# Altium PCB RPI_HAT_Flash_00.PcbDoc
Units mm, origin at the board's own origin, x right, y up, seen from the top; angles counter-clockwise.
Board outline 65 x 56 mm, 2 copper layers (Top Layer, Bottom Layer), stack 1.571 mm thick; 53 components, 63 nets, 183 pads, 155 vias.
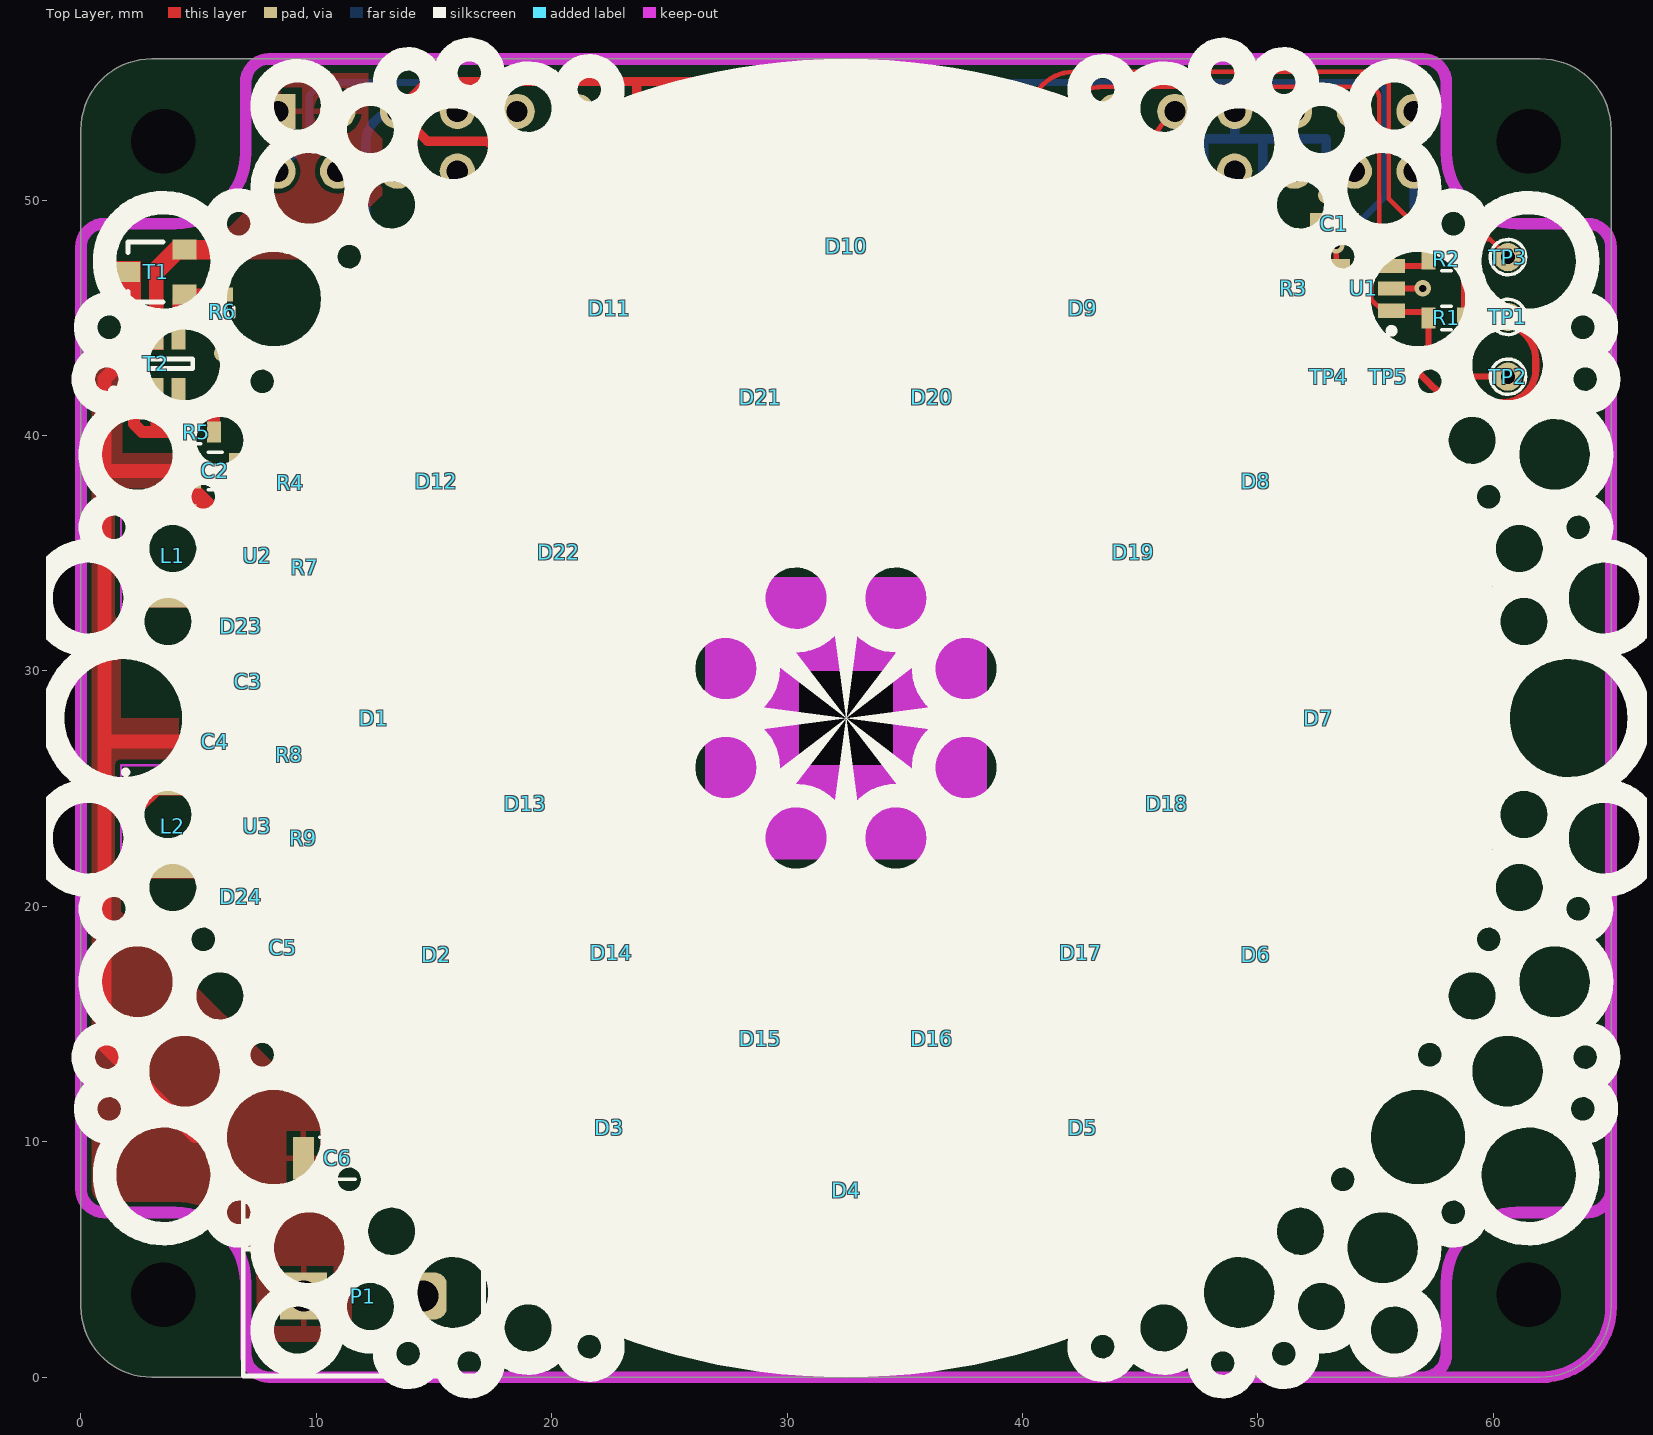
[diagram p0: Top Layer view]
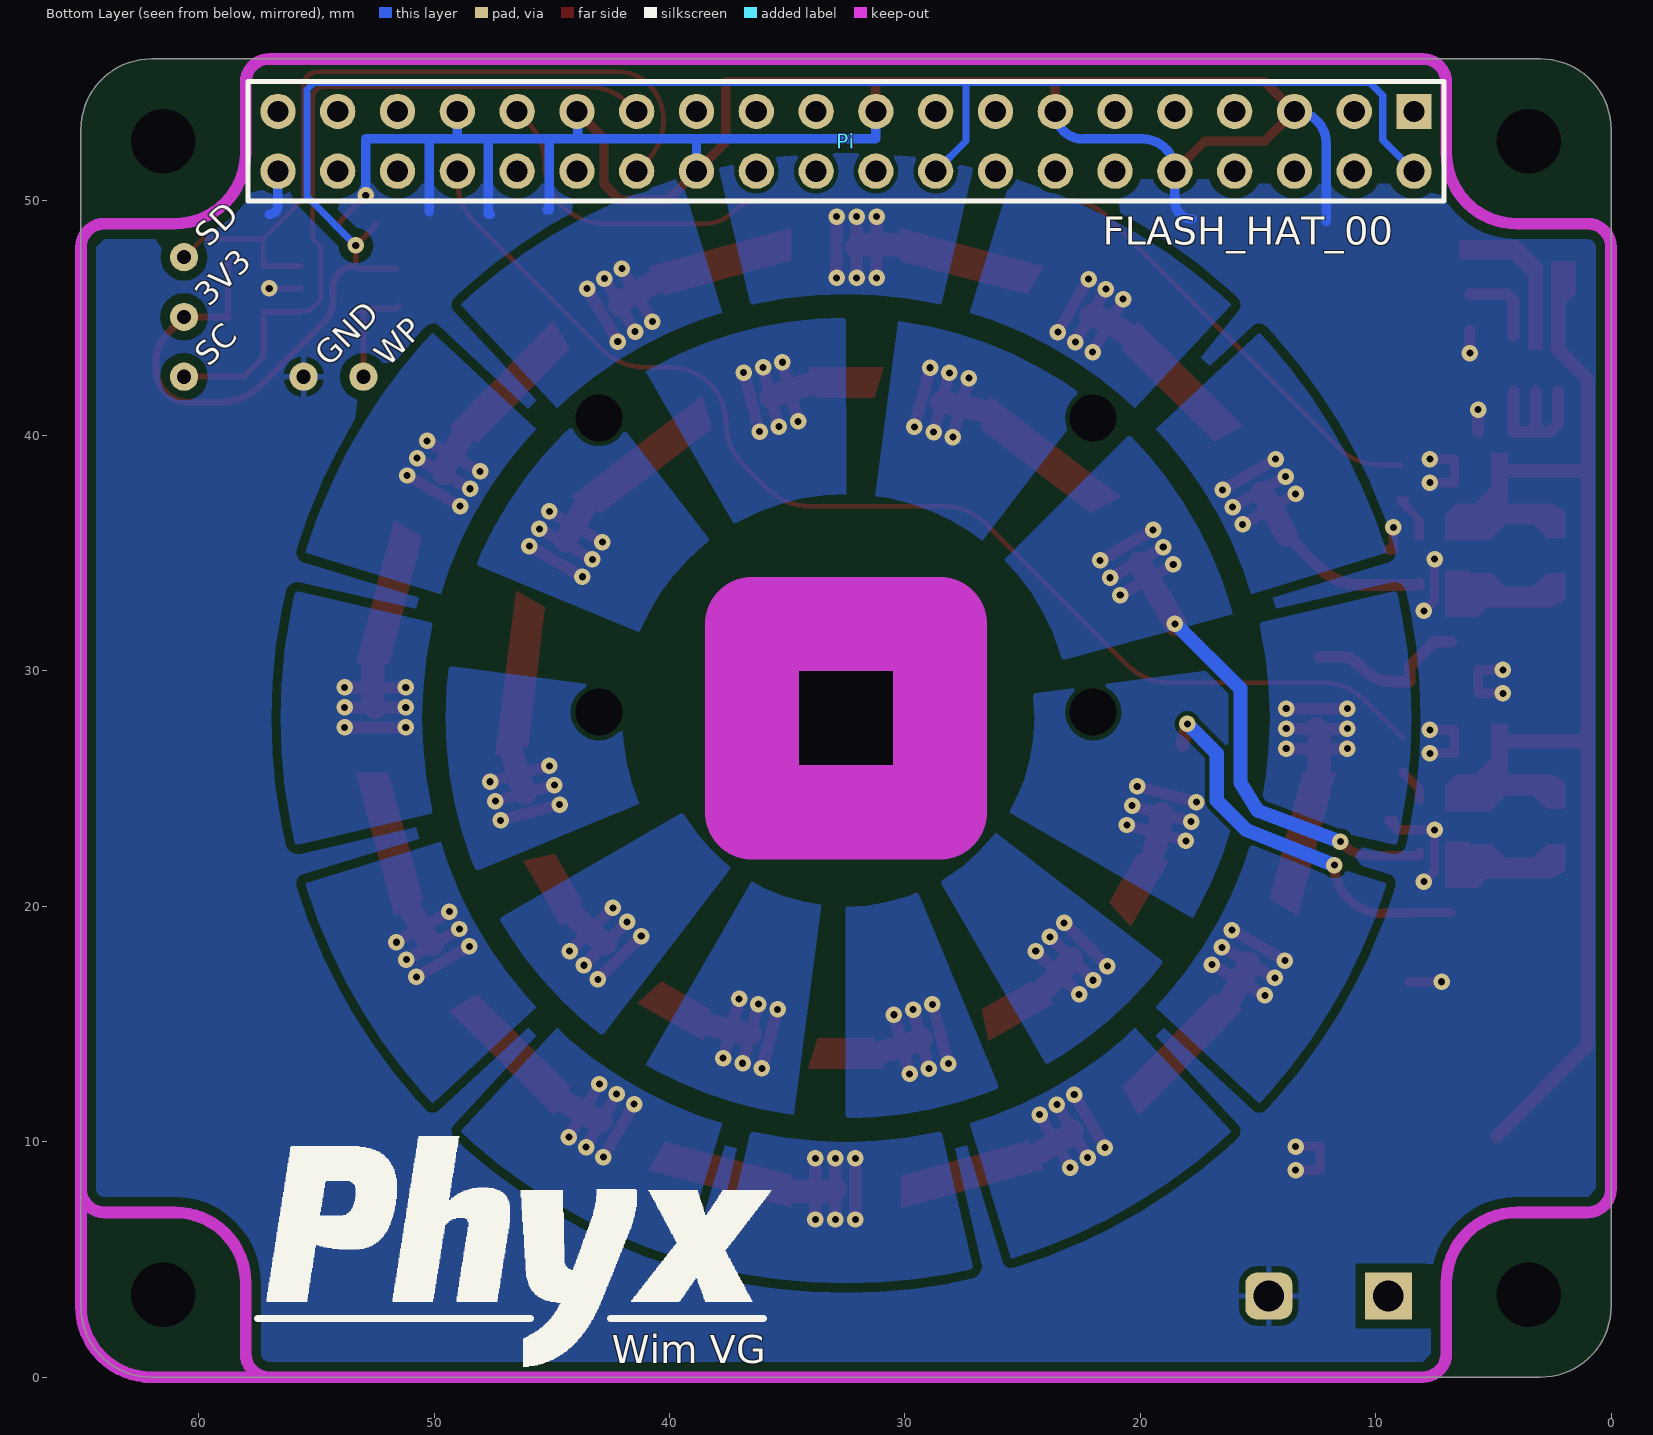
[diagram p1: Bottom Layer view, seen from below]
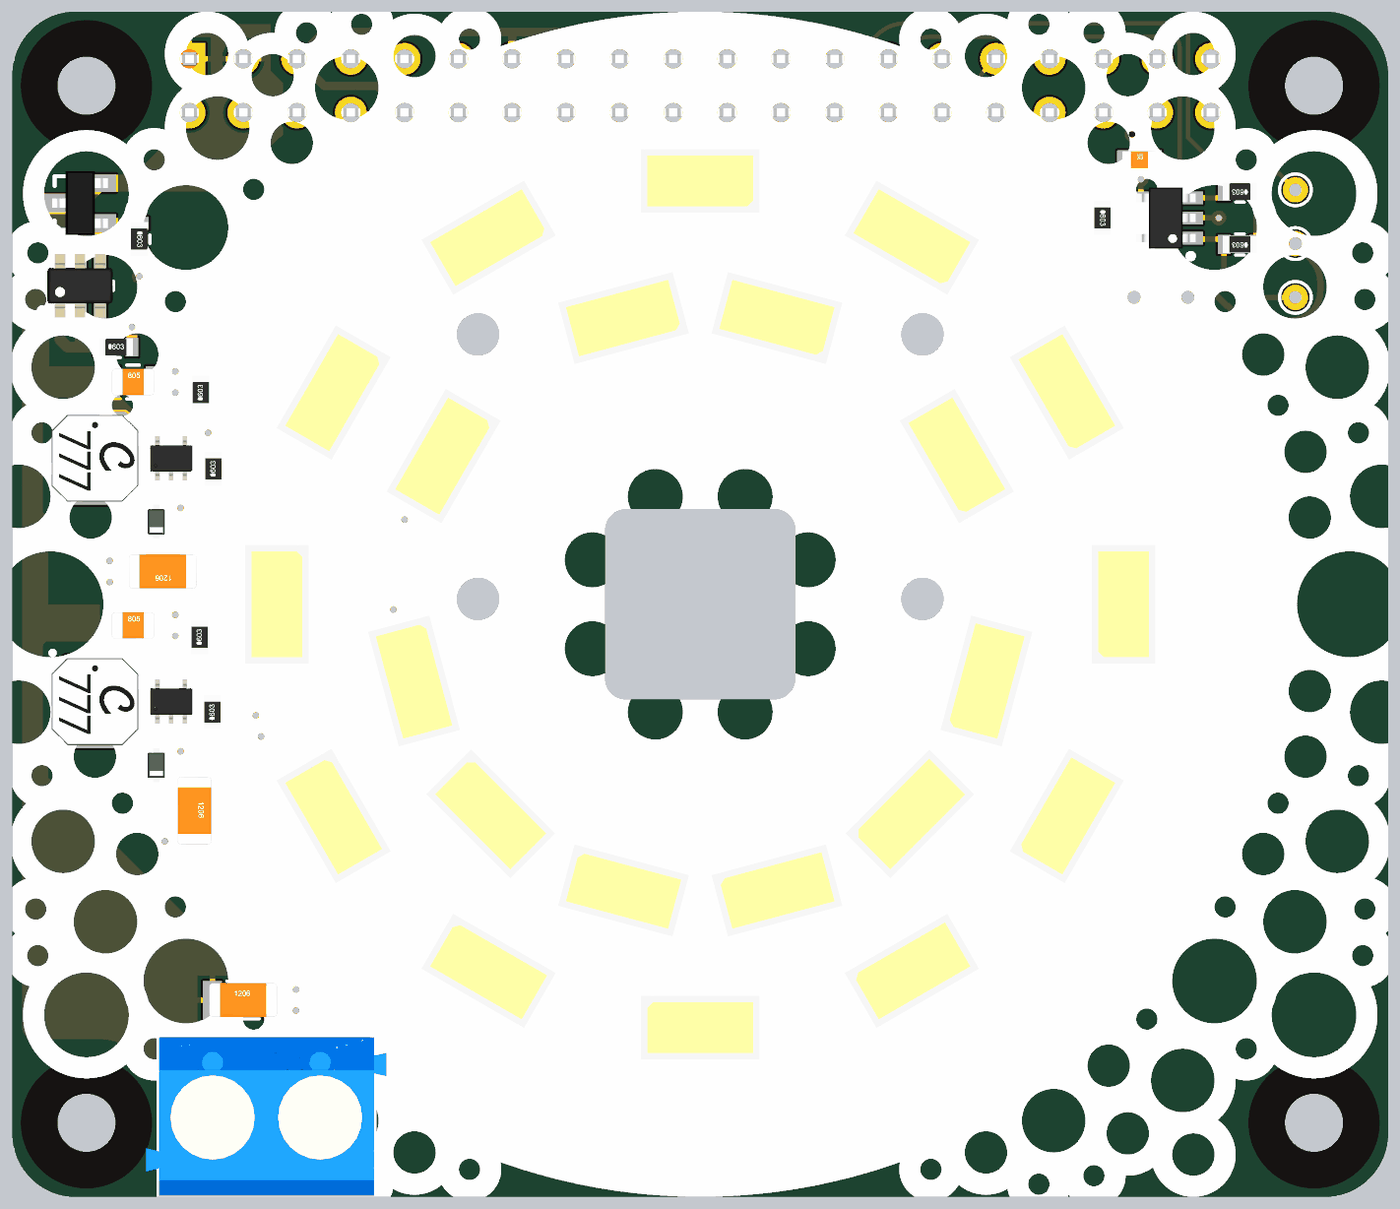
[diagram p2: 3D render of the assembled board from above, using the file's embedded part models]

## Layer stack, top to bottom
Top Solder: solder mask 0.0102, Solder Resist, Dk 3.5
Top Layer: signal copper 0.0356
Dielectric1: core 1.5, FR-4, Dk 4.8
Bottom Layer: signal copper 0.0356
Bottom Solder: solder mask 0.0102, Solder Resist, Dk 3.5

## Board outline
3,0 cw(c3,3) 0,3 0,53 cw(c3,53) 3,56 62,56 cw(c62,53) 65,53 65,3 cw(c62,3) 62,0
cut-out: 29,32.5 36,32.5 cw(c36,31.5) 37,31.5 37,24.5 cw(c36,24.5) 36,23.5 29,23.5 cw(c29,24.5) 28,24.5 28,31.5 cw(c29,31.5) 29,32.5

## Design rules (kind name [scope] priority, off if disabled: settings)
Clearance Clearance_GND_POLY [InNamedPolygon('B_GND')] p1: gap=0.4
Clearance [All] p2: gap=0.2
HoleSize [All] p1: absolutevalues=TRUE maxlimit=10 minlimit=0.025 maxpercent=80.000 minpercent=20.000
PolygonConnect PolygonConnect_VIA [IsVia] p1: connectstyle=Direct reliefconductorwidth=0.254 reliefentries=4 polygonreliefangle="90 Angle" airgapwidth=0.254
PolygonConnect [All] p2: connectstyle=Relief reliefconductorwidth=0.254 reliefentries=4 polygonreliefangle="90 Angle" airgapwidth=0.254
RoutingVias [All] p1: holewidth=0.3 width=0.7 viastyle="Through Hole" minholewidth=0.3 minwidth=0.7 maxholewidth=0.6 maxwidth=1.2
SilkToSolderMaskClearance SilkscreenOverComponentPads [IsPad] p1: minsilkscreentomaskgap=0.254 clearancetoexposedcopper=TRUE
SolderMaskExpansion [All] p1: expansion=0.102
Width [All] p1: maxlimit=2 minlimit=0.15 preferedwidth=0.25
28 further rules are at their usual default settings.

## Components (designator, comment, footprint, x,y, rotation, side; value= is the part's Value field where it differs from the comment)
C1 "CAP_CERAMIC" C0603 53.25,49 r0 top
C2 "CAP_CERAMIC" C0805 5.7,38.5 r0 top
C3 "CAP_CERAMIC" C1206 7.1,29.55 r180 top
C4 "CAP_CERAMIC" C0805 5.7,27 r0 top
C5 "CAP_CERAMIC" C1206 8.6,18.25 r270 top
C6 "CAP_CERAMIC" C1206 10.9,9.3 r0 top
D1 "5630 LM561A Samsung LED" LED_LM561A 12.5,28 r90 top
D2 "5630 LM561A Samsung LED" LED_LM561A 15.179,18 r120 top
D3 "5630 LM561A Samsung LED" LED_LM561A 22.5,10.679 r150 top
D4 "5630 LM561A Samsung LED" LED_LM561A 32.5,8 r180 top
D5 "5630 LM561A Samsung LED" LED_LM561A 42.5,10.679 r210 top
D6 "5630 LM561A Samsung LED" LED_LM561A 49.821,18 r240 top
D7 "5630 LM561A Samsung LED" LED_LM561A 52.5,28 r270 top
D8 "5630 LM561A Samsung LED" LED_LM561A 49.821,38 r300 top
D9 "5630 LM561A Samsung LED" LED_LM561A 42.5,45.321 r330 top
D10 "5630 LM561A Samsung LED" LED_LM561A 32.5,48 r0 top
D11 "5630 LM561A Samsung LED" LED_LM561A 22.5,45.321 r30 top
D12 "5630 LM561A Samsung LED" LED_LM561A 15.179,38 r60 top
D13 "5630 LM561A Samsung LED" LED_LM561A 18.977,24.377 r105 top
D14 "5630 LM561A Samsung LED" LED_LM561A 22.601,18.101 r135 top
D15 "5630 LM561A Samsung LED" LED_LM561A 28.877,14.477 r165 top
D16 "5630 LM561A Samsung LED" LED_LM561A 36.123,14.477 r195 top
D17 "5630 LM561A Samsung LED" LED_LM561A 42.399,18.101 r225 top
D18 "5630 LM561A Samsung LED" LED_LM561A 46.023,24.377 r255 top
D19 "5630 LM561A Samsung LED" LED_LM561A 44.624,35 r300 top
D20 "5630 LM561A Samsung LED" LED_LM561A 36.123,41.523 r345 top
D21 "5630 LM561A Samsung LED" LED_LM561A 28.877,41.523 r15 top
D22 "5630 LM561A Samsung LED" LED_LM561A 20.376,35 r60 top
D23 "NSR0240V2T1G Schottky ULTRAFAST, 200MA, 40V" ON_SOD-523 6.8,31.9 r90 top
D24 "NSR0240V2T1G Schottky ULTRAFAST, 200MA, 40V" ON_SOD-523 6.8,20.4 r90 top
L1 "LPS4018-472MRB" LPS4018 3.9,34.9 r270 top
L2 "LPS4018-472MRB" LPS4018 3.9,23.4 r270 top
P1 "2 Way Screw HDR 5,08mm" TERM_BLK-0508-2-90 12,3.45 r0 top
Pi "Header 20X2" RCPT2X20 32.5,52.5 r0 bottom locked
R1 "RESISTOR" R0603 58,45 r180 top
R2 "RESISTOR" R0603 58,47.5 r180 top
R3 "RESISTOR" R0603 51.5,46.25 r270 top
R4 "RESISTOR" R0603 8.9,38 r90 top
R5 "RESISTOR" R0603 4.9,40.15 r0 top
R6 "RESISTOR" R0603 6,45.25 r270 top
R7 "RESISTOR" R0603 9.5,34.4 r90 top
R8 "RESISTOR" R0603 8.85,26.45 r90 top
R9 "RESISTOR" R0603 9.45,22.9 r90 top
T1 "4A P-Ch MOSFET Vgs -4,5" SOT23-3 3.2,46.95 r90 top
T2 "Matched PNP" SOT23-6 3.2,43.05 r90 top
TP1 "TEST_PAD" TP_1.2mm_0.6mm 60.62,45.04 r0 top
TP2 "TEST_PAD" TP_1.2mm_0.6mm 60.62,42.5 r90 top
TP3 "TEST_PAD" TP_1.2mm_0.6mm 60.62,47.58 r90 top
TP4 "TEST_PAD" TP_1.2mm_0.6mm 53,42.5 r90 top
TP5 "TEST_PAD" TP_1.2mm_0.6mm 55.54,42.5 r90 top
U1 "Serial EEPROM 64K (8b) SOT35 I2C" SOT23-5 54.5,46.25 r180 top
U2 "TPS61169 38-V Boost WLED Driver with PWM" TI-DCK-R-PDSO-G5 7.5,34.9 r0 top
U3 "TPS61169 38-V Boost WLED Driver with PWM" TI-DCK-R-PDSO-G5 7.5,23.4 r0 top

## Footprints (in the part's own frame and the unit in brackets; to place one, negate y for a bottom-side part, rotate by r counter-clockwise, add the part's x,y. Pads: shape width x height; smd on the part's side, far side on the other; paste and mask are expansions set on the pad)
C0603 [mm]
  rect 0.6x0.9 smd: 1(-0.75,0) 2(0.75,0)
  silkscreen extent -0.2,-0.5 0.2,0.5, body extent -0.8,-0.4 0.8,0.4, height 0.3
C0805 [mm]
  rect 0.7x1.5 smd: 1(-0.95,0) 2(0.95,0)
  silkscreen extent -0.3,-0.8 0.3,0.8, body extent -1,-0.62 1,0.63, height 0.78
C1206 [mm]
  rect 0.9x1.8 smd: 1(-1.45,0) 2(1.45,0)
  silkscreen extent -0.76,-0.89 0.76,0.89, body extent -1.6,-0.8 1.6,0.8, height 1
LED_LM561A [mm] "LM561"
  rect 0.6x1.5 smd: 1(2.6,0.1) 2(-2.6,0.1)
  rect 2.5x1.7 smd: 3(-0.45,0)
  silkscreen extent -2.65,-1.5 3.1,1.5, body extent -2.8,-1.5 2.8,1.5, height 0.95
LPS4018 [mm] "LPS4018"
  rect 0.87x2 smd: 1(-1.765,0) 2(1.765,0)
  Top Layer region: 2.2,-1.395 2.2,1.395 1.885,1.945 0.75,1.945 0.75,1.17 1.33,0.575 1.33,-0.575 0.75,-1.17 0.75,-1.945 1.885,-1.945
  Top Layer region: -2.2,-1.395 -2.2,1.395 -1.885,1.945 -0.75,1.945 -0.75,1.17 -1.33,0.575 -1.33,-0.575 -0.75,-1.17 -0.75,-1.945 -1.885,-1.945
  silkscreen extent -2.4,-2.1 0.5,1.95, body extent -2.05,-2.05 2.05,2.05, height 1.8
ON_SOD-523 [mm] "ON_SOD-523"
  rect 0.48x0.4 smd: 1(-0.66,0) 2(0.66,0)
  silkscreen extent -0.6,-0.4 0.6,0.4, body extent -0.8,-0.4 0.8,0.4, height 0.7
R0603 [mm]
  rect 0.6x0.9 smd: 1(-0.75,0) 2(0.75,0)
  silkscreen extent -0.2,-0.5 0.2,0.5, body extent -0.8,-0.41 0.8,0.41, height 0.45
RCPT2X20 [mm] "Connector; Receptable; 20x2 Position"
  rect 1.5x1.5 hole 0.9: 1(-24.13,-1.27)
  round 1.5 hole 0.9: 2(-24.13,1.27) 3(-21.59,-1.27) 4(-21.59,1.27) 5(-19.05,-1.27) 6(-19.05,1.27) 7(-16.51,-1.27) 8(-16.51,1.27) 9(-13.97,-1.27) 10(-13.97,1.27) 11(-11.43,-1.27) 12(-11.43,1.27) 13(-8.89,-1.27) 14(-8.89,1.27) 15(-6.35,-1.27) 16(-6.35,1.27) 17(-3.81,-1.27) 18(-3.81,1.27) 19(-1.27,-1.27) 20(-1.27,1.27) 21(1.27,-1.27) 22(1.27,1.27) 23(3.81,-1.27) 24(3.81,1.27) 25(6.35,-1.27) 26(6.35,1.27) 27(8.89,-1.27) 28(8.89,1.27) 29(11.43,-1.27) 30(11.43,1.27) 31(13.97,-1.27) 32(13.97,1.27) 33(16.51,-1.27) 34(16.51,1.27) 35(19.05,-1.27) 36(19.05,1.27) 37(21.59,-1.27) 38(21.59,1.27) 39(24.13,-1.27) 40(24.13,1.27)
  silkscreen extent -25.4,-2.54 25.4,2.54, body extent -25.52,-2.5 25.53,2.5, height 8.5
SOT23-3 [mm] "SOT-23; 3 Leads; Body 3.1 x 2.5 mm, inc. leads (LxW max)"
  rect 0.85x1 smd: 1(-0.95,-1.2) 2(0.95,-1.2) 3(0,1.2)
  silkscreen extent -1.27,-0.3 1.28,1.2, body extent -1.5,-1.32 1.5,1.32, height 1.08
SOT23-5 [mm] "SOT23, 5-Leads, Body 3,1x3,2mm (max), Pitch 0,95mm, IPC Medium Density"
  rect 1.15x0.6 smd: 1(-1.175,0.95) 2(-1.175,0) 3(-1.175,-0.95) 4(1.175,-0.95) 5(1.175,0.95)
  silkscreen extent -1.3,-1.55 0.2,1.92, body extent -1.4,-1.45 1.4,1.45, height 1.45
SOT23-6 [mm] "SOT23, 6-Leads, Body 3,1x3,2mm (max), Pitch 0,95mm, IPC Medium Density"
  rect 1.15x0.6 smd: 1(-1.175,0.95) 2(-1.175,0) 3(-1.175,-0.95) 4(1.175,-0.95) 5(1.175,0) 6(1.175,0.95)
  silkscreen extent -1.3,-1.55 0.2,1.92, body extent -1.5,-1.55 1.5,1.55, height 1.4
TERM_BLK-0508-2-90 [mm] "5.08 mm pitch Terminal Block 2 way"
  rect 2x2 hole 1.3: 1(-2.54,0)
  rrect50% 2x2 hole 1.3: 2(2.54,0)
  silkscreen extent -5.1,-3.4 5.7,4, body extent -5.68,-3.4 5.68,4.1, height 9.95
TI-DCK-R-PDSO-G5 [mm] "TI-DCK-R-PDSO-G5"
  rect 0.4x0.9 smd: 1(-0.65,-1.1) 2(0,-1.1) 3(0.65,-1.1) 4(0.65,1.1) 5(-0.65,1.1)
  silkscreen extent -1.2,-1.6 1.1,0.7, body extent -1,-1.05 1,1.05, height 0.95
TP_1.2mm_0.6mm [mm] "1.2mm pad, 0.6mm hole"
  round 1.2 hole 0.6 mask+0.05: 1(0,0)
  silkscreen extent -0.75,-0.75 0.75,0.75

## Part data
C1: library part "CAP # 100nF 16V 0603", "Capacitor Ceramic"
C2 C4: library part "CAP # 2u2F 25V 0805", "Capacitor Ceramic"
C3 C5: library part "CAP # 10uF 50V 1206", "Capacitor Ceramic"
C6: library part "CAP # 10uF 25V 1206", "Capacitor Ceramic"
D1 D2 D3 D4 D5 D6 D7 D8 D9 D10 D11 D12 D13 D14 D15 D16 D17 D18 D19 D20 D21 D22: library part "LED # LM561A", "=Description"
D23 D24: library part "Schottky NSR0240V2T1G", "=Description"
L1 L2: library part "IND # 4u7H 1A3 LPS4018"
P1: library part "Terminal Block 5,08mm 2way"
Pi: library part "Receptable 2.54mm dual row 40way", "=Description"
R1 R2: library part "RES # 3K9 0603"
R3: library part "RES # 1K 0603"
R4 R8: library part "RES # 0R 0603"
R5: library part "RES # 10K 0603"
R6: library part "RES # 47K 0603"
R7 R9: library part "RES # 2R49 0603"
T1: library part "TSM2311CX P-Ch MOSFET 4A", "=Description"
T2: library part "DMMT5401-7-F matched PNP"
TP1 TP2 TP3 TP4 TP5: library part "TP 1.2mm"
U1: library part "EEPROM # I2C 8Kx8b 24LC64T-I/OT", "=Description"
U2 U3: library part "LED_DRVR # TPS61169", "=Description"

## Free pads (board coordinates)
  round 1.3 hole 2.75 unplated mask+2.45: 0(3.5,3.5) 0(3.5,52.5) 0(61.5,3.5) 0(61.5,52.5)
  round 1.3 hole 2 unplated: 0(22,28.25) 0(22,40.75) 0(43,28.25) 0(43,40.75)

## Via types
v1: diameter 0.7, hole 0.3, Top Layer to Bottom Layer, tented both sides, 155 vias

## Nets (pads, with @x,y where several pads share a name; then routed paths per layer and width w, separated by ;. In a path a pad name is that pad's centre, name@x,y a point inside that pad or via, vN(x,y) a via of type N, cw(c..) or ccw(c..) an arc to the next point about the centre after c; other vN are vias at no path point)
3V3: C1.1 Pi.2 Pi.18 R1.1 R2.1 R3.1 TP1.1 U1.4 | length 85
  Top Layer w0.25: R3.1@51.6,47.1 U1.4@53.225,47.1 ; C1.1 52.5,48.9 v1(53.325,48.075) U1.4 U1.4@53.35,47.2 ; R1.1 R2.1
  Top Layer w0.3: U1.4@53.35,47.2 cw(c53.35,46.25) 54.3,46.25 54.3,45.725 ccw(c55.567,45.725) 54.671,44.829 57.356,42.144 ccw(c59.152,43.94) 59.152,41.4 60.393,41.4 ccw(c60.393,42.807) 61.8,42.807 61.8,43.2 ccw(c60.207,43.2) 61.649,43.878 ccw(c60.207,43.2) 61.333,44.327 TP1.1 ; R1.1 58.79,45.04 TP1.1 ; TP1.1@60.714,44.812 cw(c60.942,45.04) TP1.1
  Bottom Layer w0.3: Pi.2 9.7,52.56 9.7,54.45 10.25,55 55.1,55 55.4,54.7 55.4,50.15 v1(53.325,48.075) ; 27.4,55 27.4,52.52 Pi.18
5V: C2.1 C4.1 C6.1 L1.1 L2.1 P1.1 T1.3 T2.6 U2.5 U3.5 | length 43.6
  Top Layer w0.6: T2.6 2.25,43.65 1,42.4 1,38.5 ; C4.1 1,27 ; C2.1 1,38.5 ; 4.85,10.25 1,14.1 1,27 ; 1,27 1,38.5
5V_PI: Pi.1 Pi.3 T1.2 T2.5
GND: C1.2 C2.2 C3.2 C4.2 C5.2 C6.2 P1.2 Pi.5 Pi.10 Pi.13 Pi.19 Pi.26 Pi.29 Pi.33 Pi.40 R5.2 R6.2 R7.2 R9.2 TP5.1 U1.2 U2.2 U3.2 | length 127.9
  Top Layer w0.25: U1.2 v1(57,46.25)
  Top Layer w0.254: v1(52.9,50.2) 53.929,49.171 cw(c53.759,49) C1.2
  Top Layer w0.4: v1(4.6,29.05) 5.65,29.05 C3.2 5.65,30.05 v1(4.6,30.05) ; v1(7.2,16.8) C5.2 ; v1(7.5,34.75) U2.2 7.5,33 v1(7.95,32.55) ; v1(7.7,26.5) 6.65,26.5 C4.2 6.65,27.5 v1(7.7,27.5) ; v1(7.7,38) 6.65,38 C2.2 6.65,39 v1(7.7,39) ; v1(7.95,21.05) 7.5,21.5 U3.2 v1(7.5,23.25) 9.05,23.25 R9.2 R9.2@9.2,23.65 ; v1(9.25,36.1) 9.25,35.15 R7.2 ; v1(13.4,8.8) 12.35,8.8 C6.2 12.35,9.8 v1(13.4,9.8) ; Pi.10 17.26,52.5 14.72,52.5 Pi.5 14.72,55.04 23.61,55.04 ; Pi.13 23.61,55.04 ; Pi.19 31.23,55.04 ; Pi.29 42.78,52.62 42.78,50.68 42.1,50 40.08,50 Pi.26 37.6,52.48 37.6,55.04 31.23,55.04 ; 23.61,55.04 31.23,55.04
  Top Layer w0.5: R5.2 v1(5.65,41.1) ; v1(6,43.5) R6.2@6,44.45
  Bottom Layer w0.4: 12.1,49.1 12.1,52.42 cw(c13.45,52.42) Pi.5 ; 17.8,49.2 ccw(c17.8,49.93) 18.53,49.93 Pi.10 cw(c19.9,51.23) 19.9,52.6 22.44,52.6 ccw(c22.44,53.77) Pi.13 ; Pi.19 31.23,52.6 38.85,52.6 ; Pi.26 38.85,52.6 ; Pi.29 43.9,53.77 43.9,52.6 ; 45.2,49.6 45.1,49.6 45.1,52.6 ; 47.6,49.4 47.7,49.4 47.7,52.6 ; Pi.33 49.01,52.6 ; 50.2,49.5 50.2,52.6 ; v1(52.9,50.2) 52.9,52.6 50.2,52.6 ; Pi.40 56.63,49.77 ccw(c57,49.77) 57,49.4 ; 38.85,52.6 43.9,52.6 ; 43.9,52.6 45.1,52.6 ; 45.1,52.6 47.7,52.6 ; 47.7,52.6 49.01,52.6 ; 49.01,52.6 50.2,52.6
GPIO2: Pi.4
GPIO3: Pi.6
GPIO4: Pi.8
GPIO5: Pi.30
GPIO6: Pi.32
GPIO7: Pi.25
GPIO8: Pi.23
GPIO9: Pi.22
GPIO10: Pi.20
GPIO11: Pi.24
GPIO12: Pi.31 R4.2 | length 45.2
  Top Layer w0.2: R4.2 9.798,38.75 ccw(c9.798,41.29) 11.594,39.494 21.356,49.256 cw(c23.152,47.46) 23.152,50 36.093,50 cw(c36.093,48.293) 37.3,49.5 ccw(c38.507,50.707) 38.507,49 42.748,49 ccw(c42.748,51.54) 43.572,49.137 ccw(c42.748,51.54) 44.544,49.744 44.559,49.759 ccw(c42.771,51.548) 45.164,50.73 ccw(c42.771,51.548) 45.3,51.548 cw(c47.84,51.548) 46.044,53.344 Pi.31
GPIO13: Pi.34 R8.2 | length 51.2
  Top Layer w0.2: R8.2 8.9,27.2 10.456,28.756 cw(c12.252,26.96) 12.252,29.5 18.748,29.5 ccw(c18.748,32.04) 20.544,30.244 26.556,36.256 cw(c28.352,34.46) 28.352,37 34.048,37 ccw(c34.048,39.54) 35.844,37.744 36.859,38.759 ccw(c35.069,40.548) 37.6,40.548 cw(c39.936,40.548) 38.283,42.199 cw(c39.936,40.548) 38.284,42.2 cw(c39.974,40.51) 39.974,42.9 41.048,42.9 ccw(c41.048,45.44) 42.844,43.644 48.266,49.066 ccw(c46.47,50.862) 49.01,50.862 Pi.34
GPIO14: Pi.7
GPIO15: Pi.9
GPIO16: Pi.35
GPIO17: Pi.12
GPIO18: Pi.11
GPIO19: Pi.36
GPIO20: Pi.37
GPIO21: Pi.39
GPIO22: Pi.16
GPIO23: Pi.15
GPIO24: Pi.17
GPIO25: Pi.21
GPIO26: Pi.38
GPIO27: Pi.14
ID_SC: Pi.27 R1.2 TP2.1 U1.1 | length 31.1
  Top Layer w0.2: Pi.27 41.696,54.076 cw(c43.492,52.28) 43.492,54.82 54.68,54.82 cw(c54.68,54.35) 55.15,54.35 55.15,48.35 54.8,48 54.8,45.8 55.3,45.3 U1.1
  Top Layer w0.25: U1.1@55.725,45.25 R1.2@57.25,45.25
  Top Layer w0.254: U1.1 U1.1@55.725,45.25 ; R1.2 57.25,43.33 58.08,42.5 TP2.1
ID_SD: Pi.28 R2.2 TP3.1 U1.3 | length 33
  Top Layer w0.2: 40.879,54.919 ccw(c42.399,53.4) 40.25,53.4 ccw(c42.736,53.4) 40.978,51.642 Pi.28 ; 40.879,54.919 cw(c42.161,53.638) 40.881,54.921 cw(c42.161,53.638) 42.161,55.45 54.95,55.45 cw(c54.95,54.85) 55.55,54.85 55.55,50.05 57.25,48.35 ; R2.2 57.25,48.35 ; TP3.1 59.85,48.35 57.25,48.35
  Top Layer w0.25: U1.3 57.25,47.2 R2.2
ID_WP: R3.2 TP4.1 U1.5 | length 5
  Top Layer w0.25: R3.2 51.6,45.4 53.225,45.4 U1.5 53,45.3 TP4.1
INNER_A: C5.1 D13.1 D24.1 | length 16.6
  Top Layer w0.4: D24.1 8.6,19.74 C5.1 9.7,19.7 ccw(c9.7,21.75) v1(11.75,21.75)
  Top Layer w0.6: v1(18,27.75) D13.1
  Bottom Layer w0.6: v1(11.75,21.75) 15.5,23.25 16.75,24.5 16.75,26.5 v1(18,27.75)
INNER_C: D22.2 D22.3 R9.1 U3.3 | length 27.5
  Top Layer w0.4: U3.3 8.15,22.15 R9.1 10.25,22.15 ccw(c10.25,23.719) 11.36,22.61 v1(11.5,22.75)
  Top Layer w0.5: v1(18.6,34.524) v1(20.851,33.224) ; v1(19.025,35.26) D22.3 v1(21.276,33.96) ; v1(19.45,35.996) v1(21.701,34.696)
  Top Layer w1: v1@18.521,31.988 19.639,33.924 D22.3@20.014,34.574
  Bottom Layer w0.6: v1(11.5,22.75) 15.025,24.072 15.75,25.25 15.75,29.25 v1@18.5,32
  other v1: 18.528,32
NetD1_2: D1.2 D1.3 D2.1 | length 10
  Top Layer w0.5: v1(11.2,26.7) v1(13.8,26.7) ; v1(11.2,27.55) D1.3 v1(13.8,27.55) ; v1(11.2,28.4) v1(13.8,28.4)
  Top Layer w1: D1.2 12.4,27.45 D1.3
NetD2_2: D2.2 D2.3 D3.1 | length 10
  Top Layer w0.5: v1(13.854,17.696) v1(16.105,18.996) ; v1(14.279,16.96) D2.3 v1(16.53,18.26) ; v1(14.704,16.224) v1(16.955,17.524)
  Top Layer w1: D2.3 15.368,17.474 D2.2
NetD3_2: D3.2 D3.3 D4.1 | length 10
  Top Layer w0.5: v1(21.504,9.754) v1(22.804,12.005) ; v1(22.24,9.329) D3.3 v1(23.54,11.58) ; v1(22.976,8.904) v1(24.276,11.155)
  Top Layer w1: D3.3 22.926,10.318 D3.2
NetD4_2: D4.2 D4.3 D5.1 | length 10
  Top Layer w0.5: v1(32.1,6.7) v1(32.1,9.3) ; v1(32.95,6.7) D4.3 v1(32.95,9.3) ; v1(33.8,6.7) v1(33.8,9.3)
  Top Layer w1: D4.3 33.05,7.9 D4.2
NetD5_2: D5.2 D5.3 D6.1 | length 10
  Top Layer w0.5: v1(41.504,11.605) v1(42.804,9.354) ; v1(42.24,12.03) D5.3 v1(43.54,9.779) ; v1(42.976,12.455) v1(44.276,10.204)
  Top Layer w1: D5.3 43.026,10.868 D5.2
NetD6_2: D6.2 D6.3 D7.1 | length 10
  Top Layer w0.5: v1(48.495,18.304) v1(50.746,17.004) ; v1(48.92,19.04) D6.3 v1(51.171,17.74) ; v1(49.345,19.776) v1(51.596,18.476)
  Top Layer w1: D6.3 50.182,18.426 D6.2
NetD7_2: D7.2 D7.3 D8.1 | length 10
  Top Layer w0.5: v1(51.2,27.6) v1(53.8,27.6) ; v1(51.2,28.45) D7.3 v1(53.8,28.45) ; v1(51.2,29.3) v1(53.8,29.3)
  Top Layer w1: D7.3 52.6,28.55 D7.2
NetD8_2: D8.2 D8.3 D9.1 | length 10
  Top Layer w0.5: v1(48.045,38.476) v1(50.296,39.776) ; v1(48.47,37.74) D8.3 v1(50.721,39.04) ; v1(48.895,37.004) v1(51.146,38.304)
  Top Layer w1: D8.2 49.632,38.526 D8.3
NetD9_2: D9.2 D9.3 D10.1 | length 10
  Top Layer w0.5: v1(40.724,44.845) v1(42.024,47.096) ; v1(41.46,44.42) D9.3 v1(42.76,46.671) ; v1(42.196,43.995) v1(43.496,46.246)
  Top Layer w1: D9.2 42.074,45.682 D9.3
NetD10_2: D10.2 D10.3 D11.1 | length 10
  Top Layer w0.5: v1(31.2,46.7) v1(31.2,49.3) ; v1(32.05,46.7) D10.3 v1(32.05,49.3) ; v1(32.9,46.7) v1(32.9,49.3)
  Top Layer w1: D10.2 31.95,48.1 D10.3
NetD11_2: D11.2 D11.3 D12.1 | length 10
  Top Layer w0.5: v1(20.724,45.796) v1(22.024,43.545) ; v1(21.46,46.221) D11.3 v1(22.76,43.97) ; v1(22.196,46.646) v1(23.496,44.395)
  Top Layer w1: D11.2 21.974,45.132 D11.3
NetD13_2: D13.2 D13.3 D14.1 | length 10
  Top Layer w0.5: v1(17.618,24.426) 18.874,24.763 v1(20.129,25.099) ; v1(17.838,23.605) D13.3 v1(20.349,24.278) ; v1(18.058,22.784) 19.227,23.098 19.314,23.121 v1(20.569,23.457)
  Top Layer w1: D13.3 19.2,23.2 19.227,23.098 D13.2
NetD14_2: D14.2 D14.3 D15.1 | length 10
  Top Layer w0.5: v1(21.398,17.464) 22.318,18.383 v1(23.237,19.303) ; v1(21.999,16.863) D14.3 v1(23.838,18.702) ; v1(22.601,16.262) 23.456,17.118 23.52,17.181 v1(24.439,18.101)
  Top Layer w1: D14.3 23.382,17.193 23.456,17.118 D14.2
NetD15_2: D15.2 D15.3 D16.1 | length 10
  Top Layer w0.5: v1(28.154,13.325) 28.49,14.581 v1(28.827,15.836) ; v1(28.975,13.105) D15.3 v1(29.648,15.616) ; v1(29.796,12.885) 30.109,14.054 30.132,14.141 v1(30.469,15.396)
  Top Layer w1: D15.3 30.007,14.082 30.109,14.054 D15.2
NetD16_2: D16.2 D16.3 D17.1 | length 10
  Top Layer w0.5: v1(35.401,15.629) 35.737,14.374 v1(36.074,13.118) ; v1(36.222,15.849) D16.3 v1(36.895,13.338) ; v1(37.043,16.069) 37.379,14.814 37.402,14.727 v1(37.716,13.558)
  Top Layer w1: D16.3 37.3,14.7 37.402,14.727 D16.2
NetD17_2: D17.2 D17.3 D18.1 | length 10
  Top Layer w0.5: v1(41.197,18.737) 42.117,17.818 v1(43.036,16.898) ; v1(41.798,19.338) D17.3 v1(43.637,17.499) ; v1(42.399,19.939) 43.319,19.02 43.382,18.956 v1(44.238,18.101)
  Top Layer w1: D17.3 43.307,18.882 43.382,18.956 D17.2
NetD18_2: D18.2 D18.3 D19.1 | length 10
  Top Layer w0.5: v1(44.664,24.327) 45.919,23.99 v1(47.175,23.654) ; v1(44.884,25.148) D18.3 v1(47.395,24.475) ; v1(45.104,25.969) 46.359,25.632 46.446,25.609 v1(47.615,25.296)
  Top Layer w1: D18.3 46.418,25.507 46.446,25.609 D18.2
NetD19_2: D19.2 D19.3 D20.1 | length 9.8
  Top Layer w0.5: v1(42.849,35.476) v1(45.1,36.776) ; v1(43.274,34.74) D19.3 v1(45.525,36.04) ; v1(43.699,34.004) v1(45.95,35.304)
  Top Layer w1: D19.2 D19.3@44.436,35.526
NetD20_2: D20.2 D20.3 D21.1 | length 10
  Top Layer w0.5: v1(34.531,40.604) 34.868,41.859 34.891,41.946 v1(35.204,43.115) ; v1(35.352,40.384) D20.3 v1(36.025,42.895) ; v1(36.173,40.164) 36.51,41.419 v1(36.846,42.675)
  Top Layer w1: D20.2 34.891,41.946 34.993,41.918 D20.3
NetD21_2: D21.2 D21.3 D22.1 | length 10
  Top Layer w0.5: v1(27.284,42.442) 27.598,41.273 27.621,41.186 v1(27.957,39.931) ; v1(28.105,42.662) D21.3 v1(28.778,40.151) ; v1(28.926,42.882) 29.263,41.626 v1(29.599,40.371)
  Top Layer w1: D21.2 27.598,41.273 27.7,41.3 D21.3
NetD23_2: D23.2 L1.2 U2.1
NetD24_2: D24.2 L2.2 U3.1
NetR4_1: R4.1 U2.4 | length 0.2
  Top Layer w0.25: U2.4 U2.4@8.15,36.2
NetR5_1: R5.1 T2.1 T2.2 T2.3 | length 6.9
  Top Layer w0.5: T2.1 2.25,40.5 2.6,40.15 3.2,40.15 ; T2.2 3.2,40.15 ; T2.3 R5.1 3.2,40.15
NetR6_1: R6.1 T1.1 T2.4 | length 3.5
  Top Layer w0.5: T2.4 4.15,45.75 T1.1 R6.1
NetR8_1: R8.1 U3.4 | length 1.5
  Top Layer w0.4: U3.4 8.15,25 R8.1
OUTER_A: C3.1 D1.1 D23.1 | length 7
  Top Layer w0.5: D23.1 7.51,31.24 8.55,30.2 C3.1 9.258,29.55 ccw(c9.258,31.342) 10.525,30.075 ; 10.525,30.075 10.732,30.282 ; 10.732,30.282 cw(c11.5,29.514) 11.5,30.6 D1.1
OUTER_C: D12.2 D12.3 R7.1 U2.3 | length 16.4
  Top Layer w0.4: U2.3@8.15,33.65 U2.3
  Top Layer w0.5: U2.3@8.15,33.65 R7.1 10.592,33.65 ccw(c10.592,36.19) 12.389,34.394 D12.2 ; v1(13.404,37.524) 14.443,36.924 14.529,36.874 v1(15.655,36.224) ; v1(13.829,38.26) D12.3 v1(16.08,36.96) ; v1(14.254,38.996) v1(16.505,37.696)
  Top Layer w1: D12.2 14.443,36.924 D12.3@14.818,37.574

## Polygon pours and split planes (outlines as drawn)
NetD1_2 on Bottom Layer "B_COOLING" (solid, remove dead copper, pour order 37): 9.115,22.601 cw(c32.5,28) 9.115,33.399 14.961,32.049 ccw(c32.5,28) 14.961,23.951
NetD2_2 on Bottom Layer "B_COOLING" (solid, remove dead copper, pour order 36): 14.948,11.632 cw(c32.5,28) 9.549,20.983 15.287,22.737 ccw(c32.5,28) 19.336,15.724
NetD8_2 on Bottom Layer "B_COOLING" (solid, remove dead copper, pour order 27): 50.052,44.368 cw(c32.5,28) 55.451,35.017 49.713,33.263 ccw(c32.5,28) 45.664,40.276
NetD7_2 on Bottom Layer "B_COOLING" (solid, remove dead copper, pour order 26): 55.885,33.399 cw(c32.5,28) 55.885,22.601 50.039,23.951 ccw(c32.5,28) 50.039,32.049
NetD3_2 on Bottom Layer "B_COOLING" (solid, remove dead copper, pour order 35): 25.483,5.049 cw(c32.5,28) 16.132,10.448 20.224,14.836 ccw(c32.5,28) 27.237,10.787
NetD6_2 on Bottom Layer "B_COOLING" (solid, remove dead copper, pour order 34): 55.451,20.983 cw(c32.5,28) 50.052,11.632 45.664,15.724 ccw(c32.5,28) 49.713,22.737
NetD5_2 on Bottom Layer "B_COOLING" (solid, remove dead copper, pour order 33): 48.868,10.448 cw(c32.5,28) 39.517,5.049 37.763,10.787 ccw(c32.5,28) 44.776,14.836
NetD4_2 on Bottom Layer "B_COOLING" (solid, remove dead copper, pour order 32): 37.899,4.615 cw(c32.5,28) 27.101,4.615 28.451,10.461 ccw(c32.5,28) 36.549,10.461
NetD10_2 on Bottom Layer "B_COOLING" (solid, remove dead copper, pour order 31): 27.101,51.385 cw(c32.5,28) 37.899,51.385 36.549,45.539 ccw(c32.5,28) 28.451,45.539
NetD11_2 on Bottom Layer "B_COOLING" (solid, remove dead copper, pour order 30): 16.132,45.552 cw(c32.5,28) 25.483,50.951 27.237,45.213 ccw(c32.5,28) 20.224,41.164
OUTER_C on Bottom Layer "B_COOLING" (solid, remove dead copper, pour order 29): 9.549,35.017 cw(c32.5,28) 14.948,44.368 19.336,40.276 ccw(c32.5,28) 15.287,33.263
NetD9_2 on Bottom Layer "B_COOLING" (solid, remove dead copper, pour order 28): 39.517,50.951 cw(c32.5,28) 48.868,45.552 44.776,41.164 ccw(c32.5,28) 37.763,45.213
NetD17_2 on Bottom Layer "B_COOLING" (solid, remove dead copper, pour order 39): 42.849,14.513 37.37,21.653 ccw(c32.5,28) 39.428,24 47.222,19.5 cw(c32.5,28)
NetD16_2 on Bottom Layer "B_COOLING" (solid, remove dead copper, pour order 41): 34.719,11.145 33.544,20.068 ccw(c32.5,28) 36.5,21.072 41,13.278 cw(c32.5,28)
NetD15_2 on Bottom Layer "B_COOLING" (solid, remove dead copper, pour order 42): 25.994,12.294 ccw(c32.5,28) 32.5,11 32.5,20 cw(c32.5,28) 29.439,20.609
NetD14_2 on Bottom Layer "B_COOLING" (solid, remove dead copper, pour order 43): 19.013,17.651 ccw(c32.5,28) 24,13.278 28.5,21.072 cw(c32.5,28) 26.153,23.13
INNER_C on Bottom Layer "B_COOLING" (solid, remove dead copper, pour order 44): 16.079,32.4 23.324,30.459 cw(c32.5,28) 25.782,34.718 20.479,40.021 ccw(c32.5,28)
NetD21_2 on Bottom Layer "B_COOLING" (solid, remove dead copper, pour order 45): 26.717,35.537 22.151,41.487 cw(c32.5,28) 30.281,44.855 31.26,37.419 ccw(c32.5,28)
NetD20_2 on Bottom Layer "B_COOLING" (solid, remove dead copper, pour order 46): 32.5,37.5 cw(c32.5,28) 37.25,36.227 41,42.722 ccw(c32.5,28) 32.5,45
NetD19_2 on Bottom Layer "B_COOLING" (solid, remove dead copper, pour order 47): 41.277,31.635 ccw(c32.5,28) 38.283,35.537 42.849,41.487 cw(c32.5,28) 48.206,34.506
NetD18_2 on Bottom Layer "B_COOLING" (solid, remove dead copper, pour order 48): 41.277,24.365 48.206,21.494 ccw(c32.5,28) 49.355,30.219 41.919,29.24 cw(c32.5,28)
NetD13_2 on Bottom Layer "B_COOLING" (solid, remove dead copper, pour order 49): 17.778,19.5 cw(c32.5,28) 15.645,30.219 24.568,29.044 ccw(c32.5,28) 25.572,24
GND on Bottom Layer "B_GND" (solid, remove dead copper, pour order 50): 0,0 65,0 65,56 0,56 0,2.25
5V on Top Layer "T_5V" (solid, remove dead copper, pour order 40): 11.5,1.5 11.5,7 10.5,8 10.5,11 1.7,19.8 1.7,25.85 1.75,25.9 5.25,25.9 5.25,28 1.7,28 1.7,37.6 5.25,37.6 5.25,39.25 1.75,39.25 1.75,43.25 0,43.25 0,6 4.5,1.5
5V_PI on Top Layer "T_5V_PI" (solid, remove dead copper, pour order 38): 12.2,55.4 12.2,53.2 12.8,52.6 12.8,50.2 9.884,47.5 5.7,47.5 5.7,48.25 8,50.55 8,55.4

## Keep-outs
Top Layer:
  lines w0.1: 1.7,20.9 1.7,26 4.15,26 ; 1.7,32.4 1.7,37.5 4.15,37.5
Keep-Out Layer:
  lines w0.5: 0,47.9 0,8 ccw(c1,8) 1,7 4,7 cw(c4,4) 7,4 7,1 ccw(c8,1) 8,0 62,0 ccw(c62,3) 65,3 65,48 ccw(c64,48) 64,49 61,49 cw(c61,52) 58,52 58,55 ccw(c57,55) 57,56 8,56 ccw(c8,55) 7,55 7,52 cw(c4,52) 4,49 1,49 ccw(c1,48) 0,48 ; 57,0 ccw(c57,1) 58,1 58,4 cw(c61,4) 61,7 64,7 ccw(c64,8) 65,8
  lines w4: 28.5,24 28.5,32 36.5,32 36.5,24 28.5,24
  text ".Layer_Name" at 305.5,-28 h3.5

## Other copper
Top Layer:
  region net 5V: 7.05,35.55 7.05,36.65 6.6,37.1 5.8,37.1 5.1,37.8 5.1,39.25 4.4,39.25 4.4,36.3 5.15,35.55
  region net 5V: 7.05,24.05 7.05,25.15 6.6,25.6 5.8,25.6 5.1,26.3 5.1,27.75 4.4,27.75 4.4,24.8 5.15,24.05
  region net NetD18_2: 46.5,33.4 47.4,26.4 46,26.8 45.3,32.7
  region net NetD24_2: 7.05,22.75 7.05,20.8 5.65,20.8 5.15,21.3 5.15,22.65 5.95,22.65 6.05,22.75
  region net NetD20_2: 30.9,42.9 34.1,42.9 33.7,41.6 31.3,41.6
  region net NetD17_2: 46.204,21.936 44.604,19.164 43.678,20.161 44.878,22.239
  region net NetD16_2: 41.336,15.896 38.564,14.296 38.261,15.622 40.339,16.822
  region net NetD15_2: 34.1,13.1 30.9,13.1 31.3,14.4 33.7,14.4
  region net NetD14_2: 26.436,14.296 23.664,15.896 24.661,16.822 26.739,15.622
  region net NetD13_2: 20.396,19.164 18.796,21.936 20.122,22.239 21.322,20.161
  region net NetD21_2: 26.4,41.7 20.8,37.4 22.1,36.7 26.8,40.3
  region net NetD19_2: 38.6,41.7 44.2,37.4 42.9,36.7 38.2,40.3
  region net NetR4_1: 7.95,35.55 7.95,36.45 8.6,37.1 8.6,37.4 9.1,37.4 9.1,37.15 8.35,36.4 8.35,35.55
  region net NetD23_2: 7.05,34.25 7.05,32.3 5.65,32.3 5.15,32.8 5.15,34.15 5.95,34.15 6.05,34.25
  region net 5V_PI: 2.9,43.65 3.5,43.65 3.5,46.75 4.25,47.5 6.45,47.5 6.45,48.3 3.95,48.3 2.9,47.25
  region net 5V: 2.55,43.65 2.55,47.4 1.5,47.4 1.5,46.05 1.95,45.6 1.95,43.65
  region net NetD1_2: 11.7,25.7 13.3,19.6 14.5,20.3 13.1,25.7
  region net NetD2_2: 15.637,15.608 20.072,11.125 20.762,12.332 16.849,16.308
  region net NetD3_2: 24.092,8.837 30.175,7.172 30.168,8.562 24.792,10.049
  region net NetD4_2: 34.8,7.2 40.9,8.8 40.2,10 34.8,8.6
  region net NetD5_2: 44.892,11.137 49.375,15.572 48.168,16.262 44.192,12.349
  region net NetD6_2: 51.663,19.592 53.328,25.675 51.938,25.668 50.451,20.292
  region net NetD7_2: 53.3,30.3 51.7,36.4 50.5,35.7 51.9,30.3
  region net NetD8_2: 49.363,40.392 44.928,44.875 44.238,43.668 48.151,39.692
  region net NetD9_2: 40.908,47.163 34.825,48.828 34.832,47.438 40.208,45.951
  region net NetD10_2: 30.2,48.8 24.1,47.2 24.8,46 30.2,47.4
  region net NetD11_2: 20.108,44.863 15.625,40.428 16.832,39.738 20.808,43.651
  text ".Layer_Name" at 305.5,-28 h3.5
Bottom Layer:
  text ".Layer_Name" at 305.5,-28 h3.5

## Silkscreen, mask and mechanical layers (free items; w line width, h text height)
Top Overlay:
  drawing of 120 lines, arcs and shapes, not listed
  text ".Layer_Name" at 305.5,-28 h3.5
Bottom Overlay:
  drawing of 6 lines, arcs and shapes, not listed
  text "FLASH_HAT_00" at 21.6,48.1 h1.2
  text "SD" at 59.559,47.962 h1 r315
  text "3V3" at 59.559,45.422 h1 r315
  text "WP" at 51.939,42.882 h1 r315
  text "GND" at 54.479,42.882 h1 r315
  text "SC" at 59.559,42.882 h1 r315
  text "Wim VG" at 42.45,0.6 h1.2
  text ".Layer_Name" at 305.5,-28 h3.5
Top Paste:
  text ".Layer_Name" at 305.5,-28 h3.5
Bottom Paste:
  text ".Layer_Name" at 305.5,-28 h3.5
Top Solder:
  text ".Layer_Name" at 305.5,-28 h3.5
Bottom Solder:
  region: 1849 vertices and 1 holes, not listed, extent 1.331,8.617 5.727,12.57
  text ".Layer_Name" at 305.5,-28 h3.5
Drill Guide:
  text ".Layer_Name" at 305.5,-28 h3.5
3D Symbols:
  text ".Layer_Name" at 305.5,-28 h3.5
Outline:
  lines w0.1: 0,3 ccw(c3,3) 3,0 62,0 ccw(c62,3) 65,3 65,53 ccw(c62,53) 62,56 3,56 ccw(c3,53) 0,53 0,3 ; 28,24.5 ccw(c29,24.5) 29,23.5 36,23.5 ccw(c36,24.5) 37,24.5 37,31.5 ccw(c36,31.5) 36,32.5 29,32.5 ccw(c29,31.5) 28,31.5 28,24.5
Comments:
  circle w0.2: c32.5,28 r3.8
  lines w0.1: 27.5,28 37.5,28 ; 32.5,23 32.5,33 ; 28.5,24 28.5,32 36.5,32 36.5,24 28.5,24
  lines w0.5: 31.5,52.5 33.5,52.5 ; 32.5,51.5 32.5,53.5
  lines w2: 45,4 45,19
  text "Center point" at 24,53.7 h1.52
  text ".Layer_Name" at 305.5,-28 h3.5
Fabrication:
  text ".Layer_Name" at 305.5,-28 h3.5
Placebound Top:
  text ".Layer_Name" at 305.5,-28 h3.5
Placebound Bottom:
  text ".Layer_Name" at 305.5,-28 h3.5
Frame:
  drawing of 15 lines, arcs and shapes, not listed
  text "Document" at 301,-13 h2
  text ".PCB_TITLE" at 302.5,-18.5 h4
  text "Layer Name" at 301,-23 h2
  text "Date" at 301,-33 h2
  text "Rev" at 341,-33 h2
  text ".Print_Date" at 304,-38.5 h3.5
  text ".PCB_REV" at 345.5,-38.5 h4
  text "Desginer" at 251,-43 h2
  text "Document" at 301,-43 h2
  text ".Pcb_File_Name_No_Path" at 302.5,-48 h1.5
  text ".PCB_ENGINEER" at 255.5,-48.5 h4
Assembly Top:
  text ".Layer_Name" at 305.5,-28 h3.5
Assembly Bottom:
  text ".Layer_Name" at 305.5,-28 h3.5
Drill Drawing:
  text ".legend" at 89.1,11.8 h2
  text ".Layer_Name" at 305.5,-28 h3.5

## Dimensions
3,56 to 0,0 on Fabrication
0,0 to 65,3 on Fabrication
0,0 to 3.5,3.5 on Drill Drawing
0,0 to 3.5,3.5 on Drill Drawing
37,24.5 to 36,23.5 on Fabrication
37,24.5 to 36,23.5 on Fabrication
37,31.5 to 28,31.5 on Fabrication
29,32.5 to 29,23.5 on Fabrication
65,53 to 62,56 on Fabrication
65,53 to 62,56 on Fabrication

## Text inside footprints (layer, text, board x,y; h text height)
P1: Comments "IN" at 11.4,0.95 h0.8